# Altium PCB PCB.pcbdoc (part 2 of 3)
Units mil, origin at the board's own origin, x right, y up, seen from the top; angles counter-clockwise.
Board outline 1969.98 x 1969.75 mil, 6 copper layers (Top Layer, GND1, Inner2, PWR3, Inner4, Bottom Layer); 155 components, 199 nets, 988 pads, 612 vias.
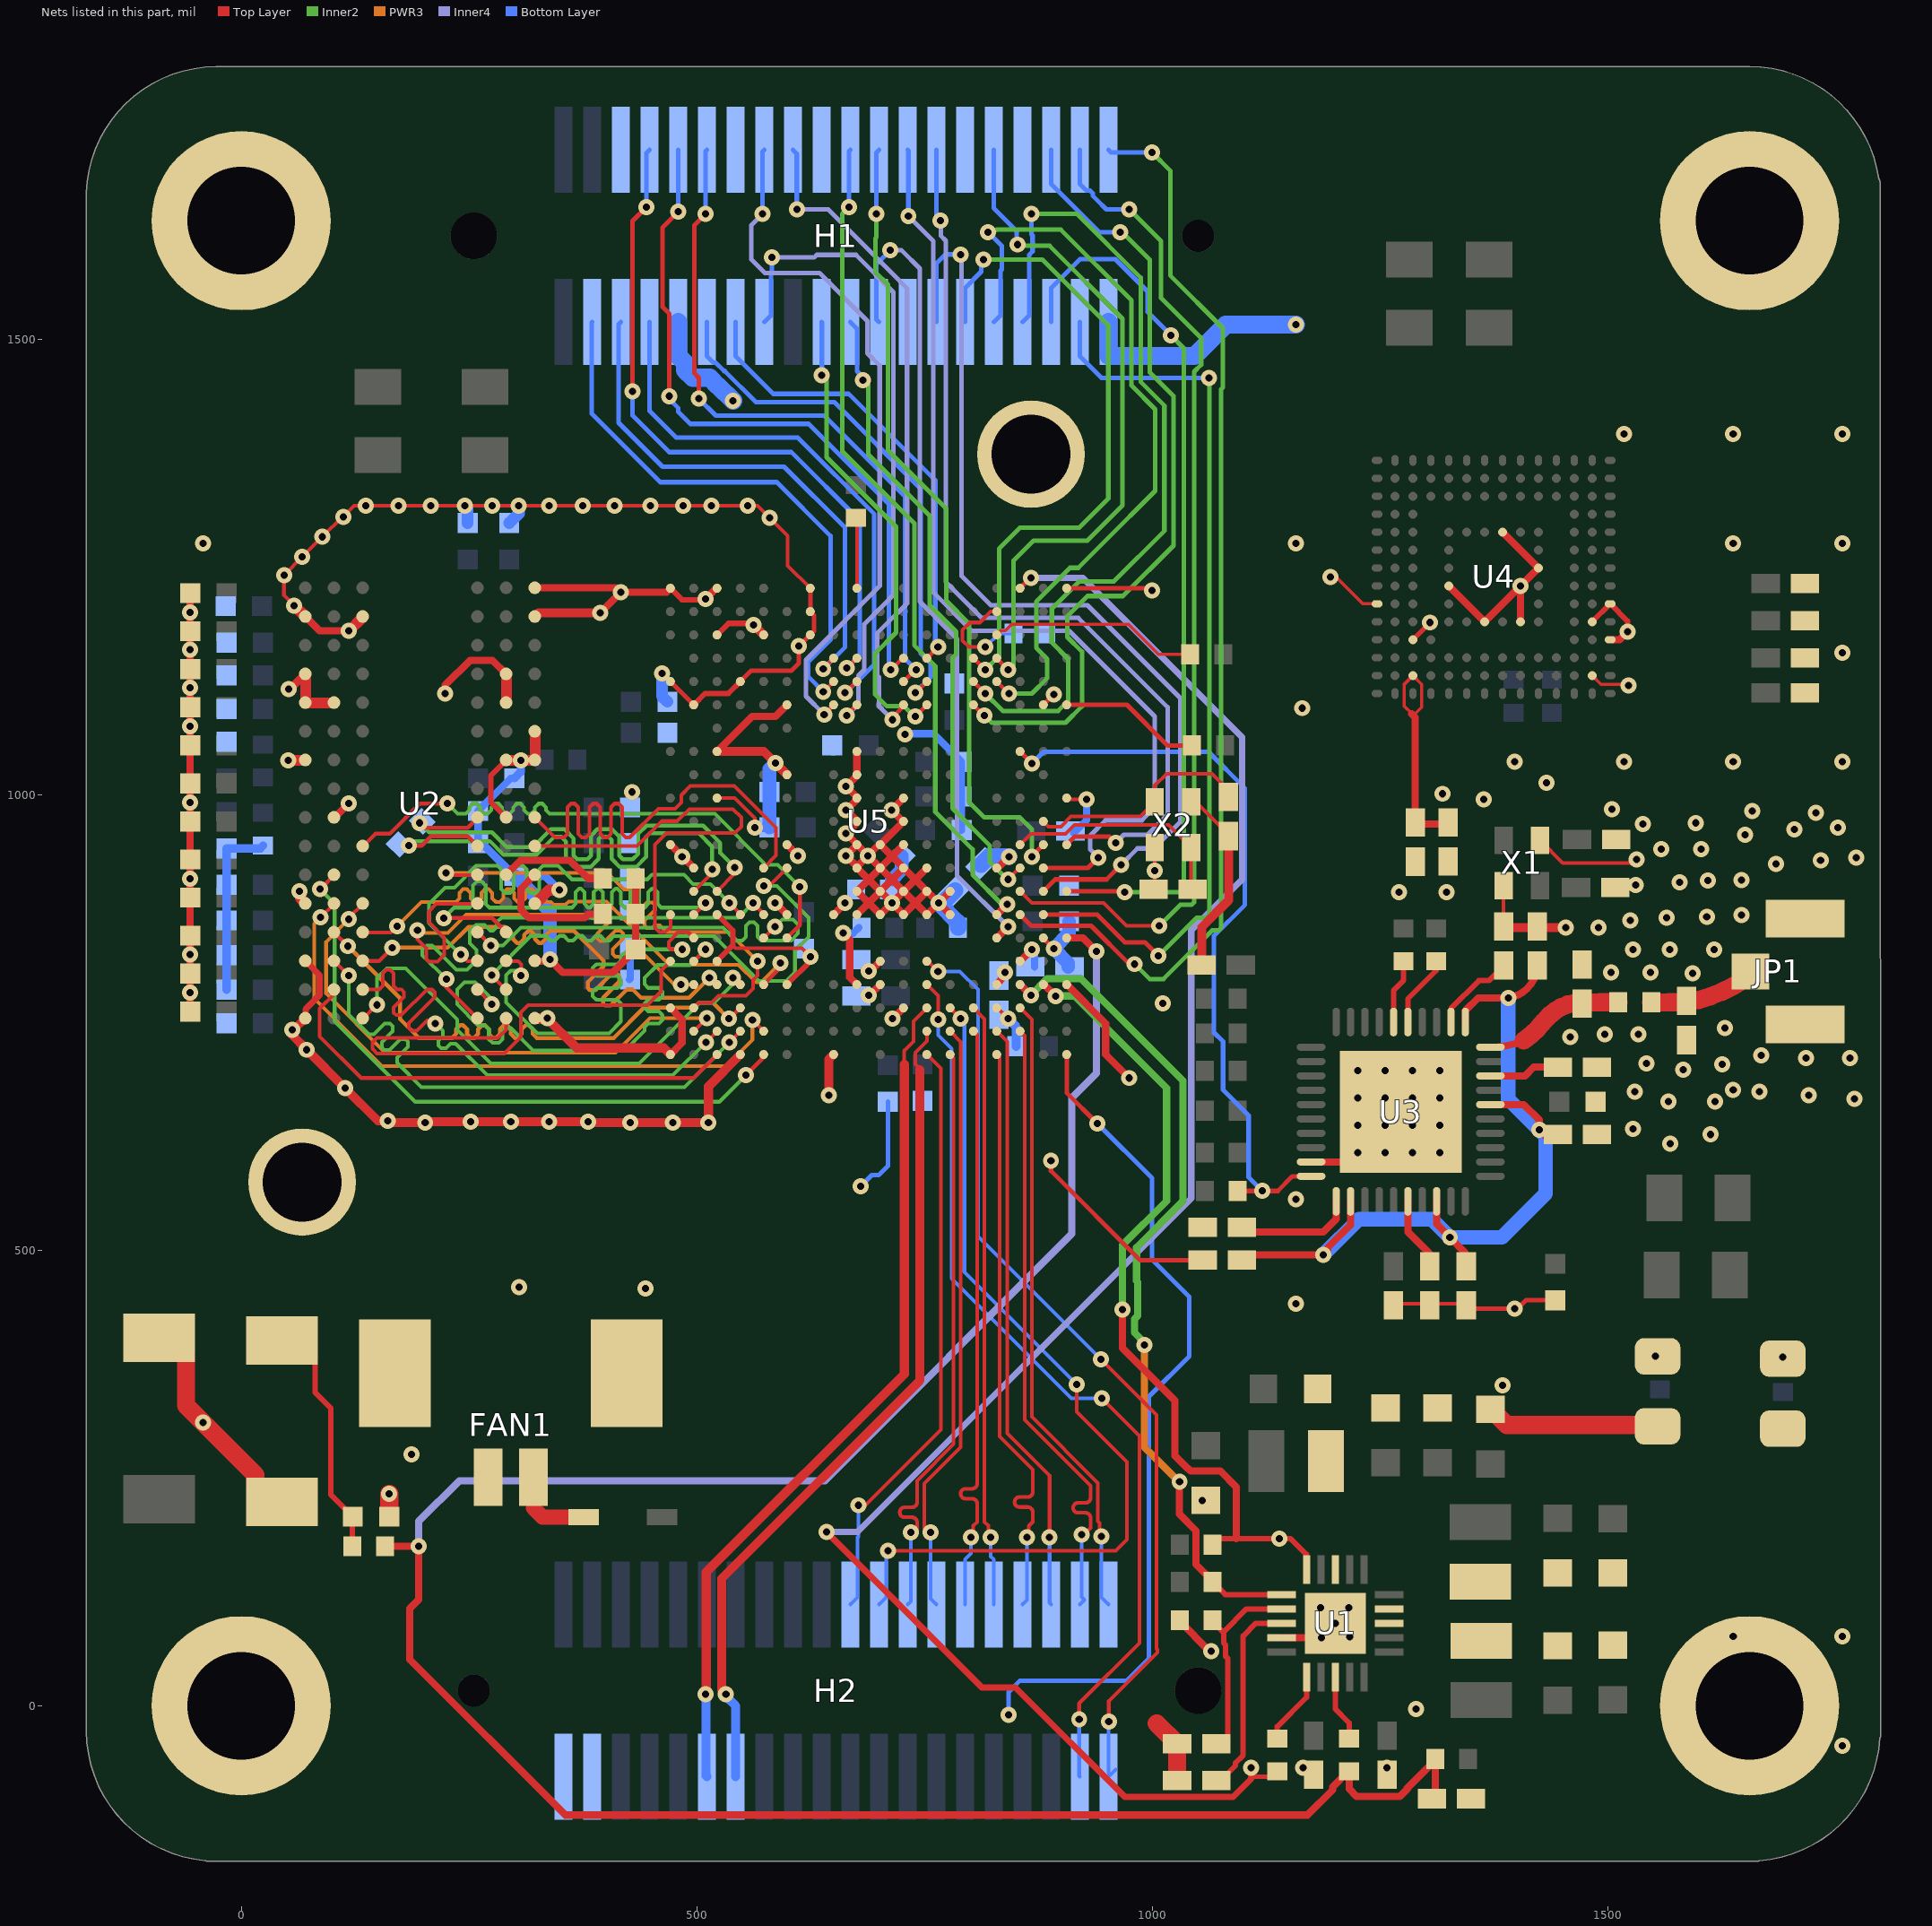
[diagram p6: the nets of this part, all layers, seen from the top]

## Via types
v1: diameter 17.7, hole 7.91, Top Layer to Bottom Layer, tented both sides, 612 vias

## Nets (pads, with @x,y where several pads share a name; then routed paths per layer and width w, separated by ;. In a path a pad name is that pad's centre, name@x,y a point inside that pad or via, vN(x,y) a via of type N, cw(c..) or ccw(c..) an arc to the next point about the centre after c; other vN are vias at no path point) (continued)
GND: 3.3V.2 5V.2 C1.1 C2.2 C3.1 C4.2 C5.1 C6.2 C7.2 C8.2 C9.2 C10.2 C11.2 C12.1 C13.2 C14.1 C15.1 C16.1 C17.1 C18.1 C19.1 C20.1 C21.1 C22.1 C23.1 C24.1 C25.1 C26.1 C27.1 C28.1 C29.1 C30.1 C31.1 C32.1 C33.1 C34.1 C35.1 C36.1 C37.1 C38.1 C39.1 C40.1 C41.1 C42.1 C43.1 C44.1 C45.1 C46.1 C47.1 C48.1 C49.1 C50.1 C51.1 C52.1 C53.1 C54.1 C55.1 C56.1 C57.1 C58.1 C59.1 C60.1 C61.1 C62.1 C63.1 C64.1 C65.1 C66.1 C67.1 C68.2 C69.2 C70.2 C71.2 C72.2 C73.2 C74.2 C75.1 C76.1 C77.1 C78.2 C79.2 C80.2 C81.1 C82.1 C83.1 C84.2 C85.2 C86.1 C87.1 C94.2 C95.1 C96.1 C97.2 C98.2 C99.2 C100.1 FAN1.2 FAN1.3 FAN1.4 FEL.2 H1.5 H1.10 H1.13 H1.19 H1.26 H1.29 H1.33 H1.40 H2.37 H2.39 JP1.2 JP1.3 pad.1 R1.1 R6.2 R8.1 R9.1 R11.1 R26.2 R32.1 R52.2 RESET.1 U1.9 U1.21 U2.A9 U2.B1 U2.B3 U2.B9 U2.D1 U2.D8 U2.E1 U2.E2 U2.E8 U2.F9 U2.G1 U2.G8 U2.G9 U2.J2 U2.J8 U2.M1 U2.M9 U2.P1 U2.P9 U2.T1 U2.T9 U3.19 U3.41 U4.A6 U4.C4 U4.E7 U4.G5 U4.H10 U4.J5 U4.K8 U4.N2 U4.N5 U4.P4 U4.P6 U5.A1 U5.A10 U5.A18 U5.A21 U5.B6 U5.B16 U5.D19 U5.F14 U5.F15 U5.G13 U5.G14 U5.G15 U5.H10 U5.H11 U5.H12 U5.H13 U5.H14 U5.H15 U5.H19 U5.J12 U5.J13 U5.J14 U5.J15 U5.K8 U5.K9 U5.K10 U5.K11 U5.K12 U5.K13 U5.K14 U5.K15 U5.L21 U5.M1 U5.M2 U5.M3 U5.N6 U5.N9 U5.N12 U5.N15 U5.N18 U5.P3 U5.R5 U5.R21 U5.T1 U5.T3 U5.T8 U5.T10 U5.T15 U5.T17 U5.U6 U5.U13 U5.V1 U5.V5 U5.V12 U5.V19 U5.V21 X1.2 X1.4 X2.2 X2.4 | length 9932.1
  Top Layer w3.5: v1(1196,1239) 1202,1239 1231.52,1209.48 U4.A6@1247.05,1209.48 ; U4.N2@1483.27,1130.73 1493,1121 1522,1121 v1(1523,1120)
  Top Layer w4: v1(58.27,1207.53) 47,1218.8 47,1241 v1(67,1261) v1(89,1283) 111,1305 v1(112,1305) 124,1317 v1(136.61,1317) v1(172.51,1317) v1(208.18,1317) v1(245.4,1317) v1(275.54,1317) v1(304.79,1317) v1(338.24,1317) v1(374.8,1317) v1(410.03,1317) v1(449.47,1317) v1(485,1317) v1(516.17,1317) v1(556,1317) 567,1317 v1(580,1304) 600,1284 600,1251.37 U5.M1@624.79,1226.59 ; U5.T10@522.43,996.27 541.73,996.27 564,974 v1(564,964) ; 539.77,834.52 542.93,831.35 615.65,831.35 v1(625,822) ; U5.D19@829.52,765.96 830.04,765.96 v1(842,754) ; U5.A10@906.29,996.27 907.55,995 v1(928,995) v1@927,996 ; C99.2@1003,896.01 v1(1003,916.82) X2.2@1003,942 ; X2.4@1043,992 1047.99,992 C94.2@1084,955.99 ; C94.2@1084,954.54 C94.2@1088.54,950 ; C69.2@1265,440.99 C84.2@1345,440.99 ; C70.2@1386,854.01 X1.4@1386,900 ; X1.2@1426,950 1451,925 1528,925 v1(1532,929)
  Top Layer w5: v1(462,1133) 462.46,1133 U5.V5@471.25,1124.22 U5.U6@496.84,1098.63 ; U5.R5@548.02,1124.22 559.8,1136 604,1136 612,1144 v1(612,1163) 612.39,1163 U5.M3@624.79,1175.4 629,1179.61 629,1196.77 U5.M2@624.79,1200.99 U5.M1@624.79,1226.59 ; U5.B16@880.7,842.73 880.7,842.3 v1(892,831) ; U5.B6@880.7,1098.7 v1(892,1110) ; v1(889,598) 889,587 987,489 C74.2@1056.99,489 ; U5.A21@906.29,714.77 906.29,672.71 v1(940,639) ; U5.A1@906.29,1226.59 997.41,1226.59 v1(1000,1224) ; U3.41@1215.88,596.88 1217.88,596.88 U3.41@1273,652 ; U4.C4@1286.41,1170.1 1305,1188.69 v1(1305,1189) ; C84.2@1345,440.99 1349.99,436 v1(1398,436) 1401.44,436 1410.45,445.01 C28.1@1442.5,445.01
  Top Layer w6: U2.J8@290.87,975.08 274,991.94 274,1020.52 U2.G8@291.19,1037.71 ; U5.V1@471.31,1226.69 483.99,1214 509,1214 v1(510,1215) ; U5.U6@496.84,1098.63 509.21,1111 534.8,1111 U5.R5@548.02,1124.22 ; U5.T3@522.43,1175.4 535.03,1188 560.48,1188 v1(562.27,1186.22) ; U5.T17@522.49,817.24 539.77,834.52 539.77,851.14 U5.T15@522.49,868.42 ; U5.N18@599.26,791.65 625,817.39 v1(625,822) ; U4.N5@1483.27,1189.78 U4.P6@1502.95,1209.48 1522,1190.43 v1(1522,1179)
  Top Layer w7: U2.T1@70.72,754.24 70.72,764.72 86,780 86,801.95 U2.P1@70.72,817.23
  Top Layer w8: C48.1@-55.99,761.77 v1(-55.99,782.88) v1(-55.99,824.53) v1(-55.99,907.63) v1(-55.99,991.28) v1(-55.99,1075.04) v1(-55.99,1117.39) v1(-55.99,1159.08) v1(-55.99,1200.02) C53.1@-55.99,1221.23 ; U2.B1@70.72,1195.19 86.16,1179.75 v1(118.27,1179.75) ; U2.J2@102.21,974.71 v1(118.03,990.53) ; v1(224,1111) 224,1120.27 251.27,1147.53 275.85,1147.53 U2.D8@291.19,1132.19 ; U2.A9@322.37,1227.08 412.09,1227.08 v1(416.95,1222.22) ; U2.P9@322.68,817.23 337.23,817.23 v1(339,819) 353,805 407.99,805 C32.1@432.99,830 R9.1@433,869 R8.1@433,908 ; v1(394.27,1199.53) v1(416.95,1222.22) ; U5.V21@471.25,714.77 484,727.52 484,753.2 U5.V19@471.25,765.96 ; U5.V12@471.25,945.09 U5.U13@496.84,919.5 ; U5.V1@471.31,1226.69 466.84,1222.22 v1(416.95,1222.22) ; v1(510,1215) 521.69,1226.69 U5.T1@522.49,1226.69 ; U5.T8@522.43,1047.45 560.98,1086 586.57,1086 U5.N6@599.2,1098.63 ; v1(586,881) 586.51,881 U5.N15@599.2,868.32 ; U5.N12@599.2,945.09 611,933.28 v1(611,933) ; v1@663,1009 v1(664,1009) ; U5.K15@675.97,868.32 688.76,881.11 ; U5.K14@675.97,893.91 688.76,881.11 ; U5.K8@675.97,1047.45 675.97,1020.97 v1(664,1009) ; U5.K14@675.97,893.91 688.77,906.7 ; v1@715,754 v1(715.2,754) U5.H19@727.16,765.96 ; U5.H12@727.16,945.09 714.36,932.29 ; U5.H10@727.16,996.27 727.16,996.16 v1(714,983) 726.32,970.68 U5.H11@727.16,970.68 U5.J12@701.57,945.09 ; U5.G13@752.75,919.5 739.95,906.7 ; U5.F15@778.34,868.32 v1(765.54,881.11) ; U5.F14@778.34,893.91 v1(765.54,881.11) ; U5.A18@906.29,791.55 949,748.83 949,715 v1(975,689) ; R1.1@1030.44,93.78 1030.44,92.62 1063.06,60 v1(1065,60) ; v1(1055,225) 1058.42,225 C11.2@1059,225.58 ; U1.9@1142.02,74.72 1185.78,74.72 v1(1186,74.5) ; v1(1165.76,-68.15) 1170.81,-68.15 1177.44,-74.78 C3.1@1177.44,-75.69 ; U3.19@1174.6,596.88 1215.88,596.88 v1(1226,607) ; C1.1@1258,-75.96 v1(1258,-68.15) ; U4.E7@1325.78,1229.15 U4.G5@1365.15,1189.78 v1(1404.52,1229.15) ; U4.H10@1384.85,1288.22 U4.K8@1424.22,1248.85 v1(1404.52,1229.15) ; U4.J5@1404.52,1189.78 v1(1404.52,1229.15) ; U4.P4@1502.95,1170.1 1513.1,1170.1 v1(1522,1179) ; v1(664,1009) 675.97,997.03 U5.K10@675.97,996.27 675.97,994.97 v1(664,983) 675.97,971.03 675.97,969.37 v1(664,957.4) 675.97,945.43 U5.K12@675.97,945.09 ; U5.K13@675.97,921.03 v1(687.99,933.06) ; U5.K13@675.97,921.03 U5.K13@675.97,919.5 688.77,906.7 ; U5.K13@675.97,921.03 v1(664,933) 675.97,944.97 U5.K12@675.97,945.09 ; U5.K12@675.97,945.09 v1(687.99,933.06) ; v1(687.99,933.06) U5.J13@701.57,919.5 ; v1(687.99,933.06) 700.02,945.09 U5.J12@701.57,945.09 ; 688.76,881.11 U5.J15@701.57,868.32 v1(714.36,881.11) ; 688.76,881.11 U5.J14@701.57,893.91 ; 688.77,906.7 U5.J13@701.57,919.5 ; 688.77,906.7 U5.J14@701.57,893.91 ; U5.J14@701.57,893.91 v1(714.36,881.11) ; U5.J14@701.57,893.91 714.36,906.7 ; U5.J13@701.57,919.5 714.36,932.29 ; U5.J13@701.57,919.5 714.36,906.7 ; U5.J12@701.57,945.09 714.36,932.29 ; v1(714.36,881.11) U5.H14@727.16,893.91 ; v1(714.36,881.11) U5.H15@727.16,868.32 739.95,881.11 ; 714.36,906.7 U5.H14@727.16,893.91 ; 714.36,906.7 U5.H13@727.16,919.5 ; 714.36,932.29 U5.H13@727.16,919.5 ; U5.H14@727.16,893.91 739.95,881.11 ; U5.H14@727.16,893.91 739.95,906.7 ; U5.H13@727.16,919.5 739.95,906.7 ; 739.95,881.11 U5.G14@752.75,893.91 ; 739.95,881.11 U5.G15@752.75,868.32 v1(765.54,881.11) ; 739.95,906.7 U5.G14@752.75,893.91 ; U5.G14@752.75,893.91 v1(765.54,881.11)
  Top Layer w9: v1(52,1116) 53.79,1116 U2.D1@70.37,1132.58 ; v1(56,742) 57.79,742 U2.T1@70.37,754.58
  Top Layer w10: v1(56,742) 56,736 v1(72,720) v1(114,678) 150,642 v1(161,642) 163,640 v1(202,640) 203,641 v1(252,641) v1(296,641) v1(338,641) v1(381,641) 382,640 v1(427,640) v1(474,640) v1(513,640) 513,679.75 U5.R21@548.02,714.77 ; U2.B9@322.37,1195.58 326.32,1199.53 v1(394.27,1199.53) ; v1@335.98,754.24 368.22,722 464.01,722 U5.V21@471.25,714.77 ; U5.U6@496.37,1098.63 U5.U6@496.84,1098.63 ; U5.T8@522.43,1047.45 573.77,1047.45 v1(586.45,1034.77) 599.2,1022.02 U5.N9@599.2,1021.86 ; v1(562.27,1186.22) 562.94,1186.22 U5.P3@573.67,1175.5 ; v1(645,670) 645,709.39 U5.L21@650.38,714.77 ; C68.2@1054.53,813 1054.53,854.53 1084,884 C94.2@1084,954.54 ; C70.2@1386,854.01 v1(1453.99,854.01)
  Top Layer w12: v1(51.75,1037.71) U2.G1@70.72,1037.71 ; v1(58.27,1207.53) 58.37,1207.53 U2.B1@70.72,1195.19 ; v1(63.85,893.86) 64.94,892.77 64.94,886.54 70.72,880.77 U2.M1@70.72,880.23 ; U2.D1@70.72,1132.19 70.72,1100.7 U2.E2@102.21,1100.7 ; v1(118.27,1179.75) U2.B3@133.71,1195.19 ; U2.G8@291.19,1037.71 v1(306.94,1037.71) 322.68,1037.71 U2.F9@322.68,1069.2 ; U2.E8@291.19,1100.7 U2.D8@291.19,1132.19 ; U2.T9@322.68,754.24 335.98,754.24 v1(336.27,754.53) ; U2.M9@322.68,880.23 337.68,895.22 v1(349.27,895.22)
  Top Layer w20: FEL.2@-90,403.59 -77.2,403.59 -60.63,387.01 -60.63,329.54 v1(-41.79,310.71) 15.63,253.28 15.63,240.49 32.2,223.91 RESET.1@45,223.91 ; C87.1@162.49,207.5 v1(162.5,232.5) ; 1005,-19.46 C5.1@1027.54,-42 C12.1@1027.54,-82 ; C2.2@1371.42,325.13 1372.21,325.13 1389.33,308 3.3V.2@1555,308
  Bottom Layer w5: v1(680,570) 692.47,582.47 699.97,582.47 710,592.5 C15.1@710,663.01 ; v1(842.5,-10) 842.5,15 855,27.5 972.5,27.5 996.6,51.6 996.6,339.33 1041,383.73 1041,448.54 999.86,489.68 999.86,579.14 v1(940,639)
  Bottom Layer w8: C62.1@260.01,947 C63.1@260.01,982 296.01,1018 C41.1@299.99,1018 ; C30.1@425.99,797 426.99,798 C39.1@426.99,835 ; v1(728.77,1066.1) 729.67,1067 759.99,1067 C23.1@790.99,1036 C22.1@790.99,961 ; v1(765.54,881.11) v1@770.11,881.11 ; C98.2@914.01,958 928,971.99 v1(928,995)
  Bottom Layer w9: C61.1@-16,786 C60.1@-16,941.01 21.01,941.01 R11.1@24,944 ; C62.1@260.01,947 263.99,947 C58.1@299.99,911 333.48,911 v1(349.27,895.22) ; C41.1@299.99,1018 306.94,1024.94 v1(306.94,1037.71)
  Bottom Layer w10: v1(564,964) C18.1@579.98,964.01 ; v1(842,754) 851,745 R26.2@851,724
  Bottom Layer w13: v1(245.4,1317) 248.58,1313.82 C44.1@248.58,1298.15 ; C51.1@294.27,1298.15 304.79,1308.67 v1(304.79,1317) ; v1(462,1133) 462,1107.99 C65.1@467.99,1102
  Bottom Layer w15: C58.1@299.99,911 339,871.99 v1(339,819) ; C18.1@579.98,964.01 579.97,1028.29 v1(586.45,1034.77) ; R6.2@714.36,906.7 725.14,917.48 C24.1@725.14,932.86 ; C96.1@907.99,811 907.99,815.01 v1(892,831) 908.99,847.99 C26.1@908.99,861
  Bottom Layer w18: v1(765.54,881.11) 787,859.66 R32.1@787,854 ; v1@770.11,881.11 C97.2@783.85,894.85
  Bottom Layer w20: H1.10@479.78,1518.78 479.78,1481.7 487.44,1474.04 487.44,1465.74 495.64,1457.54 514.4,1457.54 523.4,1448.54 523.96,1448.54 v1(540,1432.5) ; H1.40@952.22,1518.78 952.22,1481.7 952.38,1481.54 1046.54,1481.54 1081,1516 v1(1158,1516)
  other v1: 1758,-44 1290,-3.5 1217,75.5 1638,76 1758,76 1201.12,90.42 1185,107.5 1216,107.5 187,276 1385,351.5 1158,441.35 444,458 305.22,459.22 1158,556 1256,607 1286,607 1316,607 1569,617 1613,627 1528,633 1226,637 1256,637 1286,637 1316,637 1567,663 1618,663 1771,666 1226,667 1256,667 1286,667 1316,667 1721,670 1530,674 1667,674 1638,676 1226,697 1256,697 1286,697 1316,697 1583,698 1626,704 1543,705 1718,711 1766,711 1669,714 1459,734 1497,737 1533.92,737 1629,744 1012,771 1593.3,804 1504,805 1547,805 1528.24,830 1568.24,830 1617.3,830 1490,854 1525,862 1565,865 1609,866 1647,868 1271,893 1323.15,893 1531,901 1579,904 1610,906 1647,906.3 1685,924 1734,928 1773,931 484,932 1559,940 1603,940 1651,956 1705,962 1753,964 1539,968 1597,969 1729,980 1659,982 1505,984 1364,995 1319,1001 428.96,1002.97 1433,1013 1398,1036 1518,1036 1638,1036 1758,1036 1165,1095 1758,1156 47,1240.79 -42,1276 1158,1276 1638,1276 1758,1276 1518,1396 1638,1396 1758,1396
HCEC: H2.1 U5.G17 | length 1048.8
  Top Layer w4: U5.G17@752.75,817.14 753.86,817.14 v1(765,806) ; v1(944,380) 1005,319 1005,62.5 1005.84,61.66 1005.84,58.34 952.5,5 v1(952.5,-17.5)
  Bottom Layer w4: v1(765,806) 789,806 809,786 809,515 v1(944,380) v1@945,380 ; v1(952.5,-17.5) 952.2,-17.8 H2.1@952.2,-77.76 H2.1@960.04,-69.92
HDMI_0N: H2.12 U5.E20 | length 663
  Top Layer w4: v1(801.15,184.85) 803.77,187.47 803.77,197.47 808,201.7 808,219.66 808,221.66 ccw(c802.5,221.66) 802.5,227.16 795.45,227.16 cw(c795.45,232.66) 795.45,238.16 802.5,238.16 ccw(c802.5,243.66) 808,243.66 808,265 808,549 808,736.29 U5.E20@803.93,740.37
  Bottom Layer w4: H2.12@794.72,111.22 794.72,160.46 801.15,166.89 v1(801.15,184.85)
HDMI_0P: H2.10 U5.E19 | length 664
  Top Layer w4: U5.E19@803.93,765.96 816,753.88 816,201.7 820.23,197.47 820.23,187.47 v1(822.85,184.85)
  Bottom Layer w4: v1(822.85,184.85) 822.85,163.83 826.22,160.46 H2.10@826.22,111.22
HDMI_1N: H2.8 U5.D21 | length 655
  Top Layer w4: U5.D21@829.52,714.77 832.5,711.78 832.5,295.48 868.99,258.99 868.99,247.5 868.99,234.5 cw(c863.49,234.5) 863.49,229 854.54,229 ccw(c854.54,223.5) 854.54,218 863.49,218 cw(c863.49,212.5) 868.99,212.5 868.99,201.49 868.34,200.84 864.85,197.35 864.85,187.2 v1(862.5,184.85)
  Bottom Layer w4: H2.8@857.71,111.22 862.5,116.01 v1(862.5,184.85)
HDMI_1P: H2.6 U5.D20 | length 653.9
  Top Layer w4: U5.D20@829.52,740.37 841,728.88 841,299 887.5,252.5 v1(887.5,184.85)
  Bottom Layer w4: v1(887.5,184.85) 887.5,112.93 H2.6@889.21,111.22
HDMI_2N: H2.4 U5.C20 | length 699
  Top Layer w4: U5.C20@855.11,740.37 860,735.47 860,313.69 932.5,241.19 932.5,228.19 cw(c927,228.19) 927,222.69 918.91,222.69 ccw(c918.91,217.19) 918.91,211.69 927,211.69 cw(c927,206.19) 932.5,206.19 932.5,195.06 925.22,187.78 v1(922.54,187.78)
  Bottom Layer w4: H2.4@920.71,111.22 925.65,116.16 922.54,119.27 v1(922.54,187.78)
HDMI_2P: H2.2 U5.C19 | length 695
  Top Layer w4: U5.C19@855.11,765.96 868,753.06 868,317 940.5,244.5 940.5,202.7 942.5,200.7 942.5,187.5 v1(944.15,185.85)
  Bottom Layer w4: v1(944.15,185.85) 944.36,185.64 944.36,119.06 H2.2@952.2,111.22
HDMI_CN: H2.16 U5.F21 | length 657
  Top Layer w4: v1(735.15,190) 739.5,190 742,192.5 742,199.25 742,201.25 ccw(c736.5,201.25) 736.5,206.75 728.52,206.75 cw(c728.52,212.25) 728.52,217.75 736.5,217.75 ccw(c736.5,223.25) 742,223.25 742,237.5 742,247 782,287 782,711.1 U5.F21@778.34,714.77
  Bottom Layer w4: H2.16@731.73,111.22 735.15,114.64 v1(735.15,190)
HDMI_CP: H2.14 U5.F20 | length 658.6
  Top Layer w4: v1(756.85,190) 752.5,190 750,192.5 750,243.69 790,283.69 790,728.7 U5.F20@778.34,740.37
  Bottom Layer w4: v1(756.85,190) 756.85,117.6 H2.14@763.23,111.22
HHPD: H2.3 U5.G18 | length 1013.3
  Top Layer w4: U5.G18@752.75,791.55 765.17,779.12 v1(765.17,753.42) ; v1(920,-15) 920,2.5 986,68.5 986,296 986,296.5 985.75,296.5 945,337.25 v1(945,337.5)
  Bottom Layer w4: v1(765.17,753.42) 765.17,735.83 780,721 780,469 911.5,337.5 v1(945,337.5) ; v1(920,-15) 920,-77.05 H2.3@920.71,-77.76
HSCL: H2.18 U5.F19 | length 1011.2
  Top Layer w4: v1(710,170) 960,170 972.5,182.5 972.5,267.5 917.5,322.5 v1(917.5,352.5) ; U5.F19@778.34,765.66 v1(790,754) 790,754.29 U5.F19@778.34,765.96 U5.F19@778.34,765.66
  Bottom Layer w4: H2.18@700.23,111.22 708.08,119.06 708.08,168.08 v1(710,170) ; v1(790,754) 790,750.29 794,746.29 794,671.86 794,476 v1(917.5,352.5)
HSDA: H2.20 U5.G21 | length 657.1
  Top Layer w4: v1(677.5,220) 679.59,217.91 682.91,217.91 768,303 768,699.51 U5.G21@752.75,714.77
  Bottom Layer w4: H2.20@668.74,111.22 676.58,119.06 676.58,184.61 677.5,185.53 v1(677.5,220)
HXIN: C94.1 U5.B11 X2.1 | length 256.7
  Top Layer w4: U5.B11@880.7,970.68 886.37,965 900,965 911,976 987,976 X2.1@1003,992 1003,1010 1016,1023 1066,1023 1084,1005 C94.1@1084,995.99
HXOUT: C99.1 U5.C12 X2.3 | length 253.3
  Top Layer w4: U5.C12@855.11,945.09 867.02,957 905,957 915,967 1018,967 X2.3@1043,942 C99.1@1043,896.01
IRQ: R4.1 U5.C1 | length 2040.8
  Top Layer w5: U5.C1@855.11,1226.59 866.52,1238 v1(867,1238) ; 1108.67,-77.83 1131.83,-77.83 R4.1@1137.44,-72.22
  Top Layer w7: v1(642.5,190.65) 813.15,20 850,20 970.13,-100.13 1089.12,-100.13 1108.67,-80.58 1108.67,-77.83 v1(1108.67,-68.15)
  Inner4 w7: v1(642.5,190.65) 676.65,190.65 1043,557 1043,851 1099,907 1099,1063 924,1238 v1(867,1238)
LL: H2.29 U5.G19 | length 945.1
  Top Layer w4: 728,704 728,719 738,729 738,751.21 U5.G19@752.75,765.96
  Top Layer w10: v1(509.65,12.5) 510.5,13.35 510.5,146.51 728,364.01 728,704
  Bottom Layer w10: v1(509.65,12.5) 510.46,11.69 510.46,-76.96 H2.29@511.26,-77.76
LPCLK: R17.2 U3.20 U5.C8 | length 840.1
  Top Layer w5: U5.C8@855.11,1047.45 868,1034.55 v1(868,1034) ; R17.2@1094,565 v1(1121,565) 1138,565 1154.13,581.13 U3.20@1174.6,581.13
  Bottom Layer w5: v1(868,1034) 881,1047 1062,1047 1102,1007 1102,879 1068,845 1068,739 1078,729 1078,676 1106,648 1106,580.01 v1(1121,565)
LR: H2.27 U5.G20 | length 922.4
  Top Layer w4: 746.18,697.82 740,704 740,717 752.75,729.75 U5.G20@752.75,740.37
  Top Layer w10: v1(532.2,12.5) 527.5,17.2 527.5,139.47 745,356.97 745,697.82
  Bottom Layer w10: v1(532.2,12.5) 532.2,10.42 542.75,-0.14 H2.27@542.75,-77.76
NetC5_2: C5.2 R1.2 U1.7 | length 225
  Top Layer w6: R1.2@1066.44,93.78 1066.44,92.62 1077.7,81.36 1078.86,81.36 ; C5.2@1070.46,-42 1075.38,-42 1083.01,-34.37 1083.01,-2.18 1083.22,-1.97 1083.22,51.78 1080.85,54.15 1080.85,66.57 1078.86,68.56 1078.86,81.36 ; U1.7@1142.02,106.12 1103.62,106.12 1078.86,81.36
NetC12_2: C12.2 U1.8 | length 221.4
  Top Layer w6: C12.2@1070.46,-82 1075.38,-82 1091.51,-65.88 1091.51,-62.9 1100,-54.41 1100,76.5 1113.92,90.42 U1.8@1142.02,90.42
NetC66_2: C66.2 R18.1 U3.40 | length 156.7
  Top Layer w8: U3.40@1371.4,722.87 ccw(c1371.4,820.37) 1408,730
  Top Layer w20: 1408,730 ccw(c1343.81,820.13) 1431,752 cw(c1472,719.96) 1472,772 ccw(c1472,10771.71) R18.1@1512,772.08
NetC67_2: C67.2 JP1.1 R18.2 | length 125.7
  Top Layer w15: JP1.1@1659.57,803.99 1661.58,806 JP1.1@1662.09,806
  Top Layer w20: R18.2@1548,772 ccw(c1548.01,10773.83) C67.2@1587.01,772.08 ; C67.2@1587,772 ccw(c1560.26,931.02) 1659.57,803.99 ccw(c1560.26,931.02) JP1.1@1662.09,806
NetC70_1: C70.1 U3.2 | length 96.3
  Top Layer w6: U3.2@1328.12,750.4 1328.12,765.12 1359,796 1370,796 C70.1@1389,815
NetC71_1: C71.1 U3.38 | length 81.6
  Top Layer w8: U3.38@1371.4,691.37 1409.37,691.37 1419,701 C71.1@1449,701
NetC72_1: C72.1 U3.26 | length 83.2
  Top Layer w8: U3.26@1280.87,553.6 1280.87,520.13 1304,497 C72.1@1304,480
NetC73_1: C73.1 U3.21 | length 132.9
  Top Layer w8: C73.1@1097,526 1103,520 1188,520 1202.13,534.13 U3.21@1202.13,553.6
NetC74_1: C74.1 C78.1 C79.1 C84.1 U3.1 U3.22 U3.28 U3.36 | length 989.4
  Top Layer w8: C74.1@1097,488 1104,495 v1(1188,495) 1193,500 1193,503 1218,528 1218,553.48 U3.22@1217.88,553.6 ; U3.28@1312.37,553.6 1312.37,528.63 v1(1327,514) 1344,497 C84.1@1344,480 ; U3.1@1343.87,750.4 1343.87,762.87 1358,777 v1(1391,777) ccw(c1386,813.66) C78.1@1423,814.01 ; U3.36@1371.4,659.87 1408.13,659.87 1425,643 v1(1425,632) 1432,625 C79.1@1449,625
  Bottom Layer w16: v1(1188,495) 1227,534 1307,534 v1(1327,514) 1384,514 1432,562 1432,625 v1(1425,632) 1391,666 v1(1391,777)
NetC82_2: C82.2 C83.2 U4.C2 | length 259.1
  Top Layer w3.5: 1285,1089 1277,1097 1277,1121.32 U4.C2@1286.41,1130.73 1296,1121.15 1296,1096 1287,1087
  Top Layer w8: 1285,1089 1287,1087 1288.94,1085.06 1288.94,967.91 1324.76,967.91 C83.2@1324.92,968.07
NetC87_2: C87.2 R28.2 RESET.2 | length 265.9
  Top Layer w6: RESET.2@45,401.09 57.8,401.09 81.37,377.51 81.37,343.63 98.49,326.51 98.49,231.49 C87.2@122.49,207.5 122,207.01 R28.2@122,175
NetC92_2: C92.2 U5.J18 | length 17.3
  Top Layer w8: v1(689.01,780) 690.02,780 U5.J18@701.57,791.55
NetC93_2: C93.2 U5.J17 | length 17.3
  Top Layer w8: v1(688.77,806.3) 690.73,806.3 U5.J17@701.57,817.14
NetC95_2: C95.2 U5.D18 | length 17.2
  Top Layer w8: U5.D18@829.52,791.55 829.52,792.09 836.78,799.35 836.78,803.14 v1(838.64,805)
NetC96_2: C96.2 U5.C17 | length 38.4
  Top Layer w8: U5.C17@855.11,817.14 v1(868,830)
  Bottom Layer w8: v1(868,830) 870.99,827.01 C96.2@870.99,811
NetC97_1: C97.1 U5.D13 | length 53.2
  Top Layer w8: U5.D13@829.52,919.5 830.5,919.5 v1(843,932)
  Bottom Layer w18: C97.1@812.14,923.14 821,932 v1(843,932)
NetD1_1: D1.1 FAN1.1 | length 92.9
  Top Layer w17: FAN1.1@320.8,250.9 320.8,217.2 331,207 D1.1@375.8,207
NetL1_1: L1.1 U1.18
NetL2_1: L2.1 U1.19
NetL3_1: L3.1 U1.3
NetLED1_1: 3.3V.1 R48.1 | length 9.5
  Top Layer w10: 3.3V.1@1550,386 v1(1552.6,383.4) ; 3.3V.1@1555,381 v1(1552.6,383.4) ; 3.3V.1@1555,383.4 v1(1552.6,383.4)
NetLED2_1: 5V.1 R54.1 | length 1.6
  Top Layer w10: 5V.1@1692.5,380.9 v1(1692.5,382.5)
NetR4_2: R4.2 U1.11 | length 80.9
  Top Layer w6: R4.2@1137.44,-36.22 1137.44,-23.06 1169.62,9.12 U1.11@1169.62,31.32
NetR5_2: R5.2 U1.13 | length 73.9
  Top Layer w6: U1.13@1201.12,31.32 1201.12,-3.62 1216.44,-18.94 R5.2@1216.44,-36.22
NetR6_1: R6.1 U5.L15 | length 17.9
  Top Layer w8: U5.L15@650.38,868.32 v1@663,880.94
  other v1: 663,881
NetR8_2: R8.2 U2.L8 | length 121
  Top Layer w8: U2.L8@290.87,912.08 306.79,928 360.99,928 381,908 R8.2@397,908
NetR9_2: R9.2 U2.L9 | length 139.8
  Top Layer w8: U2.L9@322.37,912.08 307,896.71 307,874 316,865 377,865 381,869 R9.2@397,869
NetR12_2: R12.2 U5.D3 | length 231
  Top Layer w3.5: U5.D3@829.52,1175.4 834.12,1180 839,1180 846,1187 974,1187 1007,1154 R12.2@1042,1154
NetR13_2: R13.2 U5.K1 | length 77.8
  Top Layer w4: R13.2@675,1304 675.97,1303.03 U5.K1@675.97,1226.59
NetR14_2: R14.2 U5.A6 | length 156.2
  Top Layer w5: U5.A6@906.29,1098.63 972.37,1098.63 1017,1054 R14.2@1044,1054
NetR19_2: R19.2 U3.6 | length 70.1
  Top Layer w6: U3.6@1265.13,750.4 1265.13,785.13 1276,796 R19.2@1276,816
NetR20_2: R20.2 U3.5 | length 79.5
  Top Layer w6: U3.5@1280.87,750.4 1280.87,775.87 1312,807 R20.2@1312,817
NetR31_2: R31.2 U5.K18 | length 82.1
  Top Layer w8: v1(661,848) 668,841 668,799.51 U5.K18@675.97,791.55
  Bottom Layer w8: v1(661,848) 671.99,848 R31.2@678,854
NetR52_1: R52.1 U5.D2 | length 122.9
  Top Layer w4: v1(817,1162) 799,1162 792,1169 792,1181 800,1189 811,1189 822.99,1200.99 U5.D2@829.52,1200.99
  Bottom Layer w4: v1(817,1162) 832,1177 R52.1@848,1177
PH0: H1.24 U5.D16 | length 907.1
  Top Layer w8: U5.D16@829.52,842.73 841.79,855 v1(842,855)
  Inner4 w5: v1(712.5,1597.5) 725,1597.5 745,1577.5 745,1427.5 745,1212 786,1171 786,911 v1(842,855)
  Bottom Layer w5: H1.24@700.25,1518.78 697.5,1521.53 697.5,1582.5 v1(712.5,1597.5)
PH1: H1.21 U5.D15 | length 952.6
  Top Layer w8: U5.D15@829.52,868.32 v1(841,879.8) v1@841,880
  Inner2 w5: v1(667.5,1645) 660,1637.5 660,1377 ; 678.5,1358.5 660,1377 ; v1(841,879.8) 835.2,879.8 803,912 803,940 762,981 762,1141 739,1164 739,1298 660,1377
  Bottom Layer w5: v1(667.5,1645) 667.5,1706.5 H1.21@668.76,1707.76
PH2: H1.38 U5.B15 | length 998.5
  Top Layer w5: U5.B15@880.7,868.32 939.68,868.32 970,838 992,838 v1(1007,823)
  Inner2 w5: v1(1007,823) 1049,865 1060.07,865 1063,867.93 1063,1457 v1(1062.5,1457.5)
  Bottom Layer w5: H1.38@920.73,1518.78 920.73,1481.38 944.61,1457.5 v1(1062.5,1457.5)
PH3: H1.39 U5.C15 | length 1206.4
  Top Layer w5: U5.C15@855.11,868.32 867.42,856 933,856 975,814 v1(981,814)
  Inner2 w5: v1(981,814) 997.35,797.65 1012.65,797.65 1066,851 1072.97,851 1075.9,853.93 1075.9,1445.11 1077.85,1447.06 1077.85,1512.15 1020,1570 1020,1685 v1(1000,1705)
  Bottom Layer w5: H1.39@952.22,1707.76 954.98,1705 v1(1000,1705)
PH4: H1.36 U5.A14 | length 974.4
  Top Layer w5: U5.A14@906.29,893.91 969.09,893.91 v1(970,893)
  Inner2 w5: v1(970,893) 1032.07,893 1035,895.93 1035,1490 v1(1020.61,1504.39)
  Bottom Layer w5: H1.36@889.23,1518.78 889.23,1556.19 920.97,1587.93 959.57,1587.93 995,1552.5 995,1530 v1(1020.61,1504.39)
PH5: H1.28 U5.B14 | length 1062
  Top Layer w5: U5.B14@880.7,893.91 893.79,907 950,907 v1(966,923)
  Inner4 w5: v1(790,1593) 791,1592 791,1240 823,1208 929,1208 1031,1106 1031,970 1002,941 984,941 v1(966,923)
  Bottom Layer w5: H1.28@763.25,1518.78 763.25,1583.25 773,1593 v1(790,1593)
PH6: H1.37 U5.C14 | length 1118.7
  Top Layer w4: U5.C14@855.11,893.91 868.01,881 947,881 972,856 v1(1008,856)
  Inner2 w5: v1(975,1642.5) 1010,1607.5 1010,1545 1053.85,1501.15 1053.85,1471.97 1046.15,1464.27 1046.15,881.93 1043.22,879 1031,879 v1(1008,856)
  Bottom Layer w5: H1.37@920.73,1707.76 920.73,1670.36 928.07,1663.02 931.95,1663.02 934.88,1660.09 934.88,1657.41 939.27,1653.02 949.79,1642.5 v1(975,1642.5)
PH7: H1.23 U5.B12 | length 889.8
  Top Layer w5: v1(868,932) 868,932.39 U5.B12@880.7,945.09
  Inner2 w5: v1(697.5,1637.5) 697.5,1611.86 696.15,1610.51 696.15,1573.85 710.25,1559.75 710.25,1377.75 774,1314 774,1213 799,1188 799,992 816,975 855,975 868,962 v1(868,932)
  Bottom Layer w5: v1(697.5,1637.5) 697.5,1705.01 H1.23@700.25,1707.76
PH8: H1.22 U5.C13 | length 705.7
  Top Layer w4: v1(842,907) 854.5,919.5 U5.C13@855.11,919.5
  Inner2 w5: v1(682.5,1455) 688.5,1449 688.5,1373.5 756,1306 756,1208 785,1179 785,1154 781,1150 781,985 822,944 822,926 841,907 v1(842,907)
  Bottom Layer w5: H1.22@668.76,1518.78 676.1,1511.44 676.1,1464.92 682.5,1458.52 v1(682.5,1455)
PH9: H1.27 U5.A12 | length 1027.1
  Top Layer w5: U5.A12@906.29,945.09 915.2,954 953,954 v1(960,947)
  Inner4 w5: v1(767.5,1630) 767.99,1629.51 767.99,1613.65 773.65,1607.99 773.65,1290 773.65,1233.35 813,1194 919,1194 1017,1096 1017,978 995,956 969,956 v1(960,947)
  Bottom Layer w5: H1.27@763.25,1707.76 763.25,1637.77 767.5,1633.52 v1(767.5,1630)
PH10: H1.25 U5.B13 | length 1073.4
  Top Layer w5: U5.B13@880.7,919.5 929.5,919.5 v1(941,931)
  Inner4 w5: v1(732.5,1635) 760,1607.5 760,1437.5 760,1222 802,1180 909,1180 1003,1086 1003,986 989,972 949,972 932,955 932,940 v1(941,931)
  Bottom Layer w5: H1.25@731.75,1707.76 732.5,1707.01 v1(732.5,1635)
PI0: H1.17 U5.H6 | length 739.6
  Top Layer w4.5: v1(715,1082.22) 715,1084.98 727.16,1097.14 U5.H6@727.16,1098.63
  Inner4 w5: v1(610,1642.5) 644.38,1642.5 731,1555.88 731,1422 731,1210 698.15,1177.15 698.15,1130.85 700.07,1128.93 700.07,1097.15 v1(715,1082.22)
  Bottom Layer w5: H1.17@605.77,1707.76 610,1703.53 v1(610,1642.5)
PI1: H1.31 U5.D4 | length 753.5
  Top Layer w4.5: U5.D4@829.52,1149.81 829.52,1149.48 v1(842,1137)
  Inner2 w5: v1(842,1137) 848,1143 848,1257 870,1279 929,1279 967.5,1317.5 967.5,1522.5 887.5,1602.5 853.85,1602.5 v1(852.5,1603.85)
  Bottom Layer w5: H1.31@826.24,1707.76 826.24,1643.76 851.15,1618.85 851.15,1605.2 v1(852.5,1603.85)
PI2: H1.20 U5.G6 | length 524.2
  Top Layer w4.5: v1(740,1086) 752.63,1098.63 U5.G6@752.75,1098.63
  Inner2 w5: v1(637.5,1460.43) 642.75,1455.18 642.75,1370.25 719,1294 719,1178 696,1155 696,1109.84 708.77,1097.07 727.95,1097.07 739.01,1086 v1(740,1086)
  Bottom Layer w5: H1.20@637.26,1518.78 637.5,1518.54 v1(637.5,1460.43)
PI3: H1.30 U5.E4 | length 734.5
  Top Layer w4.5: U5.E4@803.93,1149.81 804.19,1149.81 v1(817,1137)
  Inner2 w5: v1(815,1587.5) 879.5,1587.5 952,1515 952,1325 920,1293 855,1293 832,1270 832,1152 v1(817,1137)
  Bottom Layer w5: H1.30@794.74,1518.78 794.74,1556.19 812.57,1574.02 812.57,1585.07 v1(815,1587.5)
PI4: H1.12 U5.G5 | length 585.7
  Top Layer w4.5: v1(740,1112) 740.53,1112 U5.G5@752.75,1124.22
  Bottom Layer w5: H1.12@511.28,1518.78 511.28,1481.38 518.62,1474.04 521.23,1474.04 530.23,1465.04 530.8,1465.04 564.83,1431 651,1431 746,1336 746,1155 757,1144 757,1129 v1(740,1112)
PI5: H1.9 U5.H4 | length 777.5
  Top Layer w4.5: v1(713,1137) 725.81,1149.81 U5.H4@727.16,1149.81
  Top Layer w5: v1(470,1437.5) 470,1527.97 462.5,1535.47 462.5,1622.5 v1(480,1640)
  Bottom Layer w5: v1(470,1437.5) 470,1434.31 479.97,1424.34 479.97,1420.03 493,1407 623,1407 711,1319 711,1139 v1(713,1137) ; H1.9@479.78,1707.76 480,1707.54 v1(480,1640)
PI6: H1.11 U5.H5 | length 766.1
  Top Layer w4.5: U5.H5@727.16,1124.22 739.94,1137 v1(741,1137)
  Top Layer w5: v1(502.5,1434.69) 502.5,1457.5 497.5,1462.5 497.5,1625 v1(510,1637.5)
  Bottom Layer w5: v1(502.5,1434.69) 521.19,1416 640,1416 729,1327 729,1149 v1(741,1137) ; v1(510,1637.5) 510,1706.48 H1.11@511.28,1707.76
PI7: H1.14 U5.G4 | length 514.7
  Top Layer w4.5: U5.G4@752.75,1149.75 v1(765,1162)
  Bottom Layer w5: H1.14@542.77,1518.78 542.77,1481.38 584.15,1440 667,1440 762,1345 762,1165 v1(765,1162)
PI8: H1.35 U5.E6 | length 893.5
  Top Layer w4.5: U5.E6@803.93,1098.63 815.55,1087 v1(816,1087)
  Inner2 w5: v1(816,1087) 824,1079 905,1079 923,1097 923,1157 907,1173 907,1196 929,1218 968,1218 1023.5,1273.5 1023.5,1437.52 997.5,1463.52 997.5,1587.17 967.17,1617.5 v1(965,1617.5)
  Bottom Layer w5: H1.35@889.23,1707.76 889.23,1670.36 942.09,1617.5 v1(965,1617.5)
PI9: H1.32 U5.D5 | length 856.9
  Top Layer w4.5: U5.D5@829.52,1124.22 829.65,1124.22 842.84,1111.03 v1(842.97,1111.03)
  Inner2 w5: v1(820,1617.5) 822.43,1619.93 829.01,1619.93 829.28,1620.2 899.8,1620.2 977.5,1542.5 977.5,1449 1003.5,1423 1003.5,1333.5 947.14,1277.14 919,1249 910,1249 873,1212 873,1161 885,1149 885,1128 868,1111 v1(842.97,1111.03)
  Bottom Layer w5: v1(820,1617.5) 835,1602.5 835,1576.5 833.58,1575.08 833.58,1526.12 H1.32@826.24,1518.78
PI10: H1.4 U5.L5 | length 622.3
  Top Layer w4: v1(639,1113) 639.16,1113 U5.L5@650.38,1124.22
  Bottom Layer w5: H1.4@385.29,1518.78 385,1518.49 385,1418 460,1343 588,1343 647,1284 647,1170 622.65,1145.65 622.65,1129.35 v1(639,1113)
PI11: H1.7 U5.K4 | length 779.5
  Top Layer w4.5: v1(665,1139) 665.16,1139 U5.K4@675.97,1149.81
  Top Layer w5: v1(429.65,1442.5) 429.65,1629.65 v1(445,1645)
  Bottom Layer w5: v1(429.65,1442.5) 429.65,1416.35 470,1376 604,1376 679,1301 679,1153 v1(665,1139) ; v1(445,1645) 445,1704.47 H1.7@448.29,1707.76
PI12: H1.8 U5.K5 | length 619.4
  Top Layer w4.5: v1(662.8,1112.11) 663.33,1112.11 675.44,1124.22 U5.K5@675.97,1124.22
  Bottom Layer w5: H1.8@448.29,1518.78 448.29,1421.21 477.5,1392 611,1392 695,1308 695,1143 664.11,1112.11 v1(662.8,1112.11)
PI13: H1.34 U5.E5 | length 951.1
  Top Layer w4.5: U5.E5@803.93,1124.22 817,1111.14 v1(817,1111)
  Inner2 w5: v1(817,1111) 836,1092 897,1092 908,1103 908,1149 890,1167 890,1204 920,1234 958,1234 1013.5,1289.5 1013.5,1427.14 987.5,1453.14 987.5,1567.5 917.5,1637.5 v1(867.5,1637.5)
  Bottom Layer w5: H1.34@857.73,1518.78 865.07,1526.13 865.07,1592.57 868.85,1596.35 868.85,1613.68 867.5,1615.03 v1(867.5,1637.5)
PI14: H1.15 U5.L6 | length 776
  Top Layer w4.5: v1(640,1088) 640,1088.25 U5.L6@650.38,1098.63
  Inner4 w5: v1(572.5,1637.5) 560,1625 560,1587.5 575,1572.5 635,1572.5 687.5,1520 687.5,1484.5 701,1471 701,1407.07 701,1229 620,1148 620,1108 v1(640,1088)
  Bottom Layer w5: v1(572.5,1637.5) 572.5,1705.99 H1.15@574.27,1707.76
PI15: H1.6 U5.L4 | length 589.5
  Top Layer w4: v1(639,1138) 639,1138.43 U5.L4@650.38,1149.81
  Bottom Layer w5: H1.6@416.79,1518.78 414.3,1516.29 414.3,1408.2 462.5,1360 596,1360 663,1293 663,1162 v1(639,1138)
PI16: H1.16 U5.K6 | length 727.7
  Top Layer w4.5: v1(665,1087) 665,1087.66 U5.K6@675.97,1098.63
  Inner4 w5: v1(582.5,1589.65) 629.04,1589.65 631.89,1592.5 675,1592.5 716,1551.5 716,1414 716,1219 684,1187 684,1137 677.65,1130.65 677.65,1099.65 v1(665,1087)
  Bottom Layer w5: H1.16@574.27,1518.78 581.61,1526.12 581.61,1573.53 582.5,1574.42 v1(582.5,1589.65)
PMU_SCK: R3.2 U1.6 U5.C18 | length 929.2
  Top Layer w6: R3.2@1073.44,128.78 1080.29,121.92 1096.85,121.92 U1.6@1142.02,121.92
  Top Layer w8: U5.C18@855.11,791.55 866.65,780 v1(867,780) ; v1(1030.25,245.92) 1029.95,245.62 1029.95,210.41 1048.38,191.98 1048.38,155 1066.44,136.93 R3.2@1066.44,135.78 1066.44,134.62 1072.28,128.78 R3.2@1073.44,128.78
  Inner2 w8: v1(867,780) 885,798 922,798 1034,686 1034,554 983,503 983,466.19 984.35,464.84 984.35,428.02 980.65,424.32 980.65,409.47 991.6,398.52 v1(991.6,395.9)
  PWR3 w8: v1(991.6,395.9) 991.6,283.76 1029.44,245.92 v1(1030.25,245.92)
PMU_SDA: R2.2 U1.5 U5.B18 | length 897.8
  Top Layer w6: R2.2@1066.44,176.78 1073.16,183.5 1092.5,183.5 v1(1139.84,183.5) 1152,183.5 1169.62,165.88 U1.5@1169.62,149.52
  Top Layer w8: U5.B18@880.7,791.55 881.45,791.55 v1(894,779) ; v1(967.5,435) 967.5,392.5 1005,355 1025,335 1025,274.19 1038.69,260.5 1039.49,260.5 1042.49,257.5 1075,257.5 1092.5,240 1092.5,183.5
  Inner2 w8: v1(894,779) 915,779 1016,678 1016,554 967.5,505.5 v1(967.5,435)
RESET: C100.2 R5.1 R28.1 R49.1 U5.A16 | length 2703.6
  Top Layer w8: R28.1@158,175 v1(195,175) 195,116.54 185,106.54 185,50.71 355.71,-120 1170.62,-120 1198.12,-92.5 1198.12,-89.38 1215.28,-72.22 R5.1@1216.44,-72.22 1216.44,-91.44 1224.51,-99.51 1271.94,-99.51 1280.3,-91.16 1280.3,-90.36 R49.1@1311,-59.65 ; U5.A16@906.29,842.73 924.27,842.73 v1(939,828) ; C100.2@1307.35,-102.14 1311,-98.48 R49.1@1311,-59.65 ; R49.1@1311,-58.5 R49.1@1311,-59.65
  Inner4 w8: v1(195,175) 195,202.5 239.5,247 641,247 912,518 912,667 939,694 v1(939,828)
SA0: U2.N3 U5.P18 | length 627.4
  Top Layer w4: U2.N3@133.71,848.73 164.46,848.73 v1(171.27,855.53) ; U5.P18@573.67,791.65 592,809.98 v1(592,815)
  PWR3 w4: v1(171.27,855.53) 197.73,882 235.74,882 239.74,886 239.74,892.22 243.74,896.22 247.74,896.22 251.74,892.22 251.74,886 255.74,882 259.74,882 263.74,886 263.74,892.22 267.74,896.22 271.74,896.22 275.74,892.22 275.74,886 279.74,882 283.74,882 287.74,886 287.74,892.22 291.74,896.22 295.74,896.22 299.74,892.22 299.74,886 303.74,882 307.74,882 311.74,886 311.74,892.22 315.74,896.22 319.74,896.22 323.74,892.22 323.74,886 327.74,882 340,882 343,879 356,879 359.53,882.53 400.95,882.53 470.13,813.35 545.94,813.35 565.29,794 571,794 v1(592,815)
  other v1: 592,815
SA1: U2.P7 U5.R15 | length 578.5
  Top Layer w4: v1(241.27,824.53) 248.57,817.23 U2.P7@259.69,817.23 ; v1(536,881) 548.08,868.92 U5.R15@548.08,868.42
  Inner2 w4: v1(241.27,824.53) 240.47,824.53 206,859 206,880 224,898 234,898 258,922 281.36,922 285.36,918 285.36,896.22 289.36,892.22 295.36,892.22 299.36,896.22 299.36,918 303.36,922 309.36,922 313.36,918 313.36,896.22 317.36,892.22 323.36,892.22 327.36,896.22 327.36,918 331.36,922 348,922 363,907 446,907 451,912 486,912 496,902 515,902 v1(536,881)
  other v1: 241.27,824.53 241.27,824.53 536,881
SA2: U2.P3 U5.T18 | length 595.5
  Top Layer w4.5: U2.P3@133.71,817.23 151.23,817.23 v1(166,832) ; v1(514,799) 521.35,791.65 U5.T18@522.49,791.65
  PWR3 w4.5: v1(166,832) 226.73,832 249.73,855 289.58,855 298.55,846.03 298.55,841.63 303.05,837.13 306.05,837.13 310.55,841.63 310.55,846.03 315.05,850.53 318.05,850.53 322.55,846.03 322.55,841.63 327.05,837.13 330.05,837.13 334.55,841.63 334.55,846.03 339.05,850.53 365.47,850.53 397.99,818.01 397.99,811.65 380.45,794.11 380.45,787.74 382.57,785.62 388.94,785.62 406.48,803.16 412.84,803.16 414.96,801.04 414.96,794.68 397.42,777.13 397.42,770.77 399.54,768.65 405.91,768.65 423.45,786.19 429.81,786.19 439,777 492,777 v1(514,799)
  other v1: 514,799
SA3: U2.N2 U5.R19 | length 605.8
  Top Layer w4.5: U2.N2@102.21,848.73 v1(117.27,833.67) ; v1@534.27,754.22 536.24,754.22 U5.R19@548.08,766.06
  PWR3 w4.5: v1(117.27,833.67) 174.27,776.67 174.27,753.73 195,733 231.47,733 235.97,737.5 235.97,742.5 240.47,747 243.47,747 247.97,742.5 247.97,737.5 252.47,733 255.47,733 259.97,737.5 259.97,742.5 264.47,747 267.47,747 271.97,742.5 271.97,737.5 276.47,733 279.47,733 283.97,737.5 283.97,742.5 288.47,747 291.47,747 295.97,742.5 295.97,737.5 300.47,733 303.47,733 307.97,737.5 307.97,742.5 312.47,747 315.47,747 319.97,742.5 319.97,737.5 324.47,733 409,733 442.22,766.22 497.22,766.22 502.22,771.22 518.25,771.22 v1(535.25,754.22)
  other v1: 535.25,754.22
SA4: U2.P8 U5.U16 | length 530.8
  Top Layer w4: U2.P8@291.19,817.23 304.07,817.23 307.77,813.53 307.77,801.78 v1(307.2,801.22) ; v1(484.29,830.22) 471.58,830.22 469.27,832.53 469.27,838.53 480.27,849.53 488.52,849.53 489.12,848.93 490.79,848.93 U5.U16@496.9,842.83
  Inner2 w4: v1(307.2,801.22) 301.42,807 296,807 291,802 291,772 325.13,737.87 403.87,737.87 417,751 417,770.79 413,774.79 389.99,774.79 385.99,778.79 385.99,783.79 389.99,787.79 413,787.79 417,791.79 417,796.79 413,800.79 389.99,800.79 385.99,804.79 385.99,809.79 389.99,813.79 413,813.79 417,817.79 417,822 425.22,830.22 v1(484.29,830.22)
  other v1: 307.2,801.22 307.2,801.22 484.29,830.22 484.29,830.22
SA5: U2.P2 U5.R20 | length 633.7
  Top Layer w4: U2.P2@102.21,817.23 v1(118.23,801.22) ; v1(535.83,728.22) U5.R20@548.08,740.47
  Inner2 w4: v1(118.23,801.22) 118.23,758.77 140.16,736.84 145.82,736.84 157.66,748.68 163.32,748.68 166.15,745.85 166.15,740.19 154.31,728.35 154.31,722.69 157.13,719.87 162.79,719.87 174.63,731.71 180.29,731.71 183.12,728.88 183.12,723.22 171.28,711.38 171.28,705.72 198,679 486.61,679 v1(535.83,728.22)
  other v1: 535.83,728.22
SA6: U2.R8 U5.N13 | length 577.7
  Top Layer w4: v1(275,802) 275,801.58 290.84,785.74 U2.R8@291.19,785.74 ; v1(574,900) 579.66,900 U5.N13@599.26,919.6
  Inner2 w4: v1(275,802) 318,845 334.4,845 339.4,840 344.4,840 349.4,845 354.4,845 359.4,840 364.4,840 369.4,845 374.4,845 379.4,840 384.4,840 389.4,845 394.4,845 399.4,840 404.4,840 408.97,844.57 519.14,844.57 568.25,795.46 598.46,795.46 608,805 608,829 623,844 623,865 588,900 v1(574,900)
SA7: U2.R2 U5.T21 | length 523.5
  Top Layer w4: U2.R2@102.21,785.74 102.21,781.21 86.27,765.27 86.27,734.73 132,689 496.62,689 U5.T21@522.49,714.87
SA8: U2.T8 U5.V17 | length 572.8
  Top Layer w4: U2.T8@290.87,754.58 290.87,741.87 282,733 149,733 144,728 144,721 149,716 289,716 307,734 307,761 315,769 446,769 461,784 461,806.89 U5.V17@471.25,817.14
SA9: U2.R3 U5.T20 | length 628.2
  Top Layer w4: U2.R3@133.37,786.08 151.37,786.08 155.37,790.08 155.37,804 159.37,808 163.37,808 167.37,804 167.37,790.08 171.37,786.08 175.92,786.08 178.59,783.41 178.59,777.75 167.25,766.41 167.25,760.75 170.07,757.93 175.73,757.93 204.07,786.27 209.73,786.27 212.56,783.44 212.56,777.78 184.22,749.44 184.22,743.78 187.05,740.95 192.7,740.95 204.05,752.3 209.7,752.3 v1(213,749) ; v1(510.27,728.25) U5.T20@522.49,740.47
  Inner2 w4: v1(213,749) 221.31,740.69 221.31,735.03 216.55,730.27 216.55,724.61 219.38,721.78 225.04,721.78 229.8,726.54 235.46,726.54 270,692 474.02,692 v1(510.27,728.25)
  other v1: 510.27,728.25 213,749
SA10: U2.L7 U5.U19 | length 596.3
  Top Layer w4: v1(225,914) 227.28,911.72 U2.L7@259.69,911.72 ; U5.U19@496.9,766.06 502.06,771.22 516.27,771.22 524.27,779.22 554.27,779.22 562.16,787.11 562.16,796.41 567,801.25 v1(567,817)
  PWR3 w4: v1(225,914) 402,914 420.05,895.95 425.71,895.95 428.54,898.78 434.19,898.78 437.02,895.95 437.02,890.29 425.71,878.98 425.71,873.32 428.54,870.49 434.19,870.49 445.51,881.81 451.17,881.81 453.99,878.98 453.99,873.32 442.68,862.01 442.68,856.35 445.51,853.52 451.17,853.52 453.99,856.35 459.65,856.35 466.78,849.22 534.78,849.22 v1(567,817)
  other v1: 567,817
SA11: U2.R7 U5.U17 | length 570.5
  Top Layer w4: U2.R7@259.69,785.74 v1(275.27,770.16) ; U5.U17@496.9,817.24 v1(509.88,830.22)
  Inner2 w4: v1(275.27,770.16) 275.27,775.73 257,794 245,794 237,786 237,770 260,747 267.86,747 271.86,743 271.86,731.46 275.86,727.46 282.86,727.46 286.86,731.46 286.86,739.86 291,744 296,744 321,719 421,719 443,741 443,744.89 447,748.89 458.67,748.89 462.67,752.89 462.67,757.89 458.67,761.89 447,761.89 443,765.89 443,770.89 447,774.89 458.67,774.89 462.67,778.89 462.67,783.89 458.67,787.89 447,787.89 443,791.89 443,799 457,813 492.66,813 v1(509.88,830.22)
  other v1: 275.27,770.16 275.27,770.16 275.27,770.16 275.27,770.16 509.88,830.22 509.88,830.22 509.88,830.22 509.88,830.22
SA12: U2.N7 U5.P16 | length 463.6
  Top Layer w4: U2.N7@259.69,848.73 260.07,848.73 v1(274.27,834.53) ; U5.P16@573.67,842.83 585.84,855 v1(586,855)
  Inner2 w4: v1(274.27,834.53) 287.53,834.53 307,854 529,854 543,840 550.01,840 554.01,844 554.01,856.17 558.01,860.17 563.01,860.17 567.01,856.17 567.01,844 571.01,840 603.73,840 611.27,847.53 611.27,857.53 605.8,863 594,863 v1(586,855)
  other v1: 586,855
SA13: U2.T3 U5.R18 | length 550.2
  Top Layer w4: U2.T3@133.71,754.24 148.68,769.22 v1(149.27,769.22) ; v1(540,799) 547.35,791.65 U5.R18@548.08,791.65
  Inner2 w4: v1(149.27,769.22) 149.27,798.88 159.77,809.38 180.62,809.38 237,753 237,742 274,705 437,705 503.22,771.22 518.95,771.22 540,792.27 v1(540,799)
  other v1: 540,799
SA14: U2.T7 U5.P15 | length 561.8
  Top Layer w4.5: v1(225.27,797.53) 225.27,788.67 U2.T7@259.69,754.24 ; v1(562,881) 573.67,869.33 U5.P15@573.67,868.42
  Inner2 w4: v1(225.27,797.53) 199,823.8 199,830 203.53,834.53 209.47,834.53 236,808 248,808 258.27,818.27 258.27,829.53 251,836.8 251,850 258,857 267,857 273.47,850.53 276.69,850.53 281.19,855.03 281.19,860.5 285.69,865 546,865 v1(562,881)
  other v1: 225.27,797.53
SA15: U2.M7 U5.U18 | length 589
  Top Layer w4: v1(193.62,851.08) 193.62,841.18 203.27,831.53 203.27,819.53 206.27,816.53 215.53,816.53 223,824 223,843 206,860 206,872 214.23,880.23 U2.M7@259.69,880.23 ; v1(482.84,791.65) U5.U18@496.9,791.65
  PWR3 w4: v1(193.62,851.08) 196.7,848 227,848 247.22,868.22 381.78,868.22 385.4,864.6 391.06,864.6 393.88,867.43 399.54,867.43 402.37,864.6 402.37,858.94 391.06,847.63 391.06,841.97 393.88,839.15 399.54,839.15 410.85,850.46 416.51,850.46 419.34,847.63 419.34,841.97 408.03,830.66 408.03,825 410.85,822.17 416.51,822.17 419.34,825 442,825 475.35,791.65 v1(482.84,791.65)
  other v1: 482.84,791.65
SBA0: U2.M2 U5.P20 | length 676.1
  Top Layer w4: v1(87.27,865.28) U2.M2@102.21,880.23 ; v1(561.27,752.87) U5.P20@573.67,740.47
  PWR3 w4: v1(87.27,865.28) 80.27,858.28 80.27,776.22 154.48,702 532,702 561.27,731.27 v1(561.27,752.87)
SBA1: U2.N8 U5.U15 | length 599.6
  Top Layer w4.5: v1(222.27,864.53) 275.38,864.53 U2.N8@291.19,848.73 ; U5.U15@496.84,868.32 497.32,868.32 v1(510,881)
  Inner2 w4: v1(222.27,864.53) 233.73,876 250.4,876 254.4,880 254.4,900.4 259,905 264,905 268.4,900.6 268.4,880 272.4,876 363,876 367,880 367,893 371,897 373,897 377,893 377,880 381,876 383,876 387,880 387,893 391,897 393,897 397,893 397,880 401,876 403,876 407,880 407,893 411,897 413,897 417,893 417,880 421,876 423,876 427,880 427,893 431,897 433,897 437,893 437,880 441,876 443,876 447,880 447,893 451,897 453,897 457,893 457,880 461,876 505,876 v1(510,881)
  other v1: 222.27,864.53 510,881
SBA2: U2.M3 U5.U20 | length 596.1
  Top Layer w4: v1(118.27,863.22) 118.27,864.78 U2.M3@133.71,880.23 ; U5.U20@496.9,740.47 v1(511.27,754.84)
  PWR3 w4: v1(118.27,863.22) 93.27,838.22 93.27,781.73 158,717 411.05,717 448.89,754.84 v1(511.27,754.84)
SCAS: U2.K3 U5.N16 | length 650.5
  Top Layer w4.5: U2.K3@133.71,943.22 147.49,957 163,957 196.22,990.22 v1(226.27,990.22) ; U5.N16@599.26,842.83 613.27,856.84 613.27,898.73 v1(613,899)
  Inner2 w4: v1(226.27,990.22) 237.48,979 246.53,979 250.53,983 250.53,986.18 254.53,990.18 258.53,990.18 262.53,986.18 262.53,983 266.53,979 270.53,979 274.53,983 274.53,986.18 278.53,990.18 282.53,990.18 286.53,986.18 286.53,983 290.53,979 294.53,979 298.53,983 298.53,986.18 302.53,990.18 306.53,990.18 310.53,986.18 310.53,983 314.53,979 318.53,979 322.53,983 322.53,986.18 326.53,990.18 330.53,990.18 334.53,986.18 334.53,983 338.53,979 520,979 576,923 589,923 v1(613,899)
SCKE0: U2.K9 U5.V15 | length 489.9
  Top Layer w4: U2.K9@319.43,943.46 434.46,943.46 462,971 479,971 492,984 540,984 549,975 549,965 542,958 467,958 454,945 454,854 459,849 465.73,849 471.31,854.57 U5.V15@471.31,868.42
SCKE1: U2.J9 U5.P13 | length 566.3
  Top Layer w4: U2.J9@322.37,975.08 344.44,953 354.24,953 358.18,956.94 358.18,986.24 362.12,990.17 366.24,990.17 370.18,986.24 370.18,956.94 374.12,953 378.24,953 382.18,956.94 382.18,986.24 386.12,990.17 390.24,990.17 394.18,986.24 394.18,956.94 398.12,953 402.24,953 406.18,956.94 406.18,986.24 410.12,990.17 414.24,990.17 418.18,986.24 418.18,956.94 422.12,953 426.4,953 457.94,984.53 476.27,984.53 483.27,991.53 483.27,999.53 493.27,1009.53 541.47,1009.53 587.27,963.73 587.27,933.2 U5.P13@573.67,919.6
SCKN: R7.2 U2.K7 U5.U14 | length 602.8
  Top Layer w4: U5.U14@496.84,893.91 517,914.07 v1(517,918)
  Top Layer w4.4: v1(184,944) 198,944 208.27,954.27 248.64,954.27 U2.K7@259.69,943.22
  Inner2 w4.4: v1(184,944) 189,949 273.03,949 287.89,934.13 324.01,934.13 343.48,953.6 351.52,953.6 356.6,948.52 356.6,929.52 365.52,920.6 383.48,920.6 392.4,929.52 392.4,951.52 394.48,953.6 403.52,953.6 406.6,950.52 406.6,929.52 415.52,920.6 433.48,920.6 444.4,931.52 444.4,953.52 448.48,957.6 502.4,957.6 517,943 v1(517,918)
SCKP: R7.1 U2.J7 U5.T14 | length 609.4
  Top Layer w4: U5.T14@522.43,893.91 542,913.48 v1(542,920)
  Top Layer w4.4: v1(196,969) 196,967.56 192.11,963.67 248.64,963.67 U2.J7@259.69,974.71
  Inner2 w4.4: v1(196,969) 206.27,958.73 275.17,958.73 291.37,942.53 320.53,942.53 340,962 355,962 365,952 365,933 369,929 380,929 384,933 384,955 391,962 407,962 415,954 415,933 419,929 430,929 436,935 436,957 445,966 507,966 526,947 526,936 v1(542,920)
SCS0: U2.L2 U5.P21 | length 704.3
  Top Layer w4.5: v1(86.71,896.22) U2.L2@102.21,911.72 ; v1(554,692) 573.67,711.67 U5.P21@573.67,714.82
  Inner2 w4.3: v1(86.71,896.22) 102.67,880.26 102.67,751.33 191,663 525,663 v1(554,692)